# Altium PCB PCB1.PcbDoc
Units mil, origin at the board's own origin, x right, y up, seen from the top; angles counter-clockwise.
Board outline 2637.8 x 1850.39 mil, 2 copper layers (Top Layer, Bottom Layer); 76 components, 45 nets, 279 pads, 190 vias.
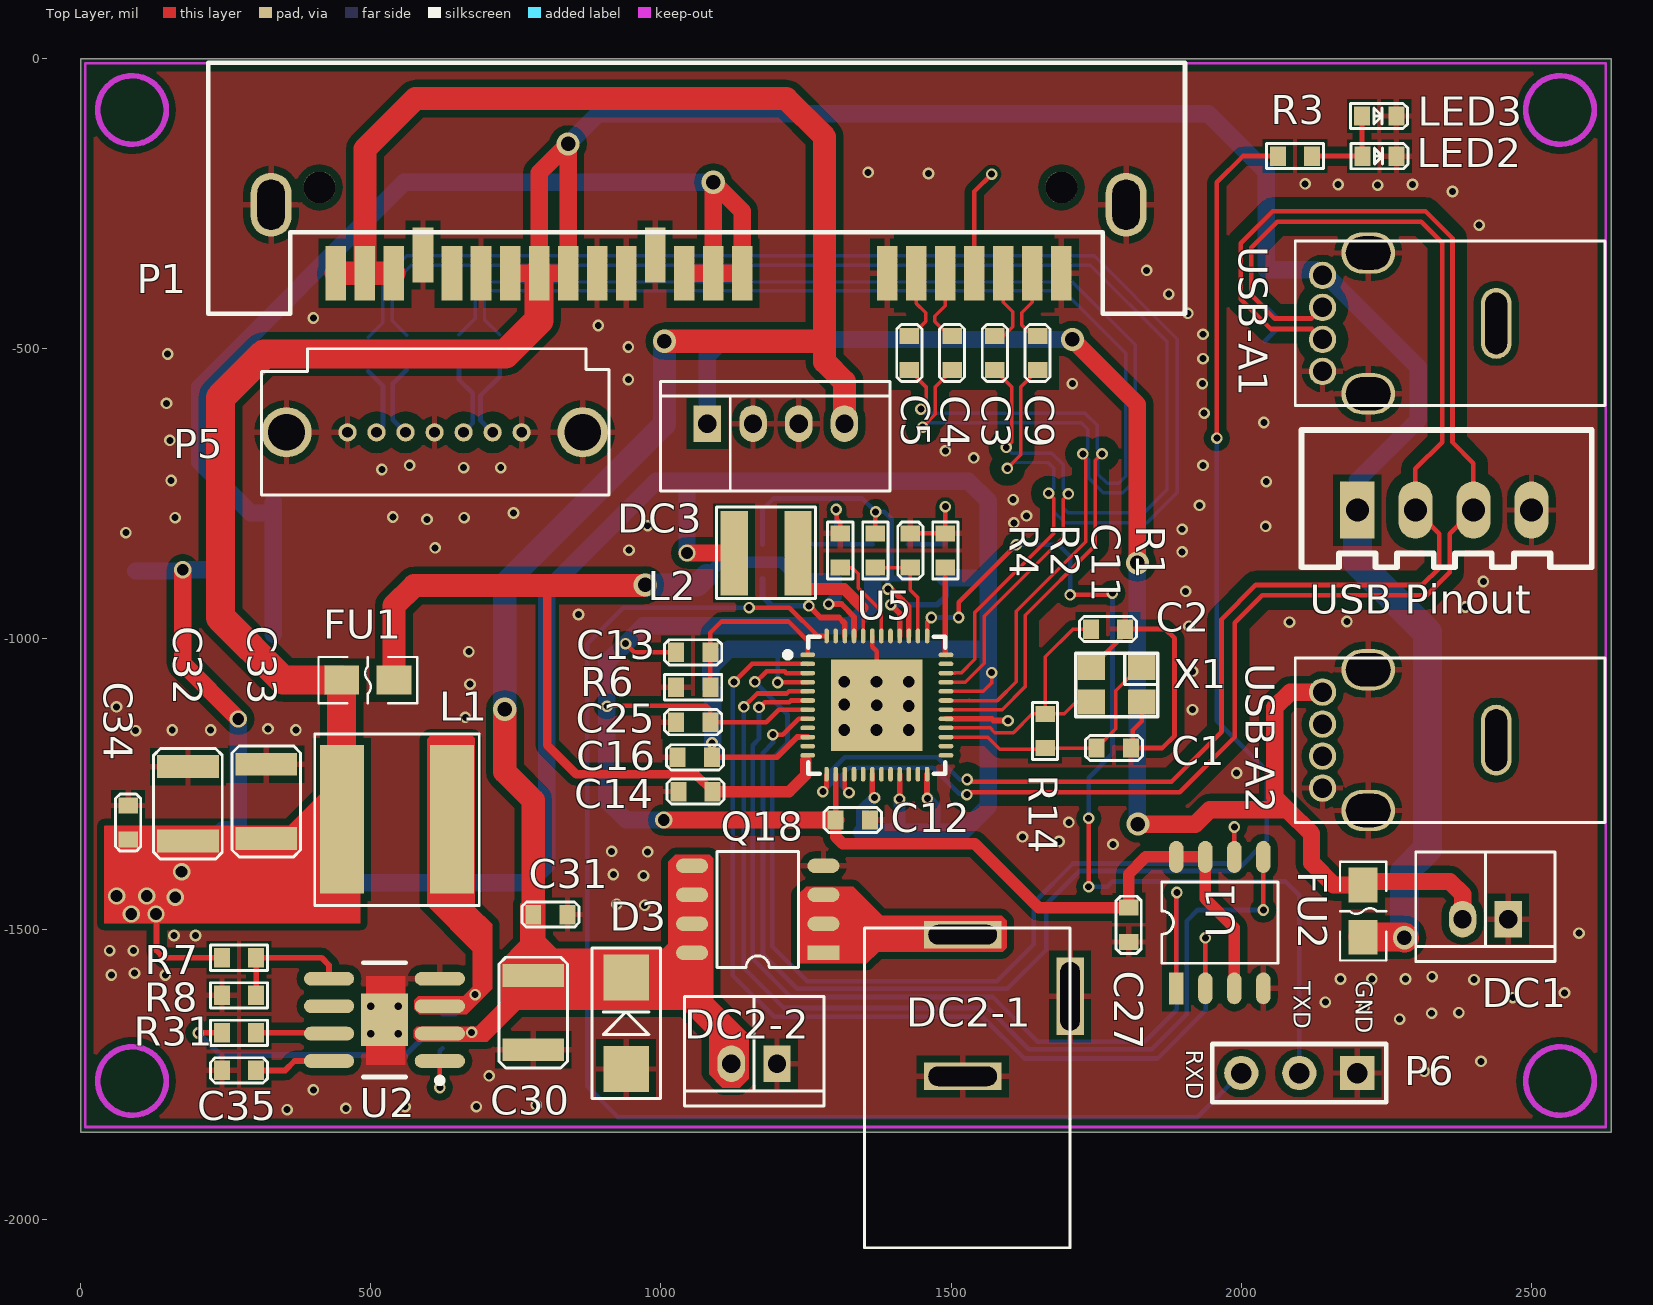
[diagram p0: Top Layer view]
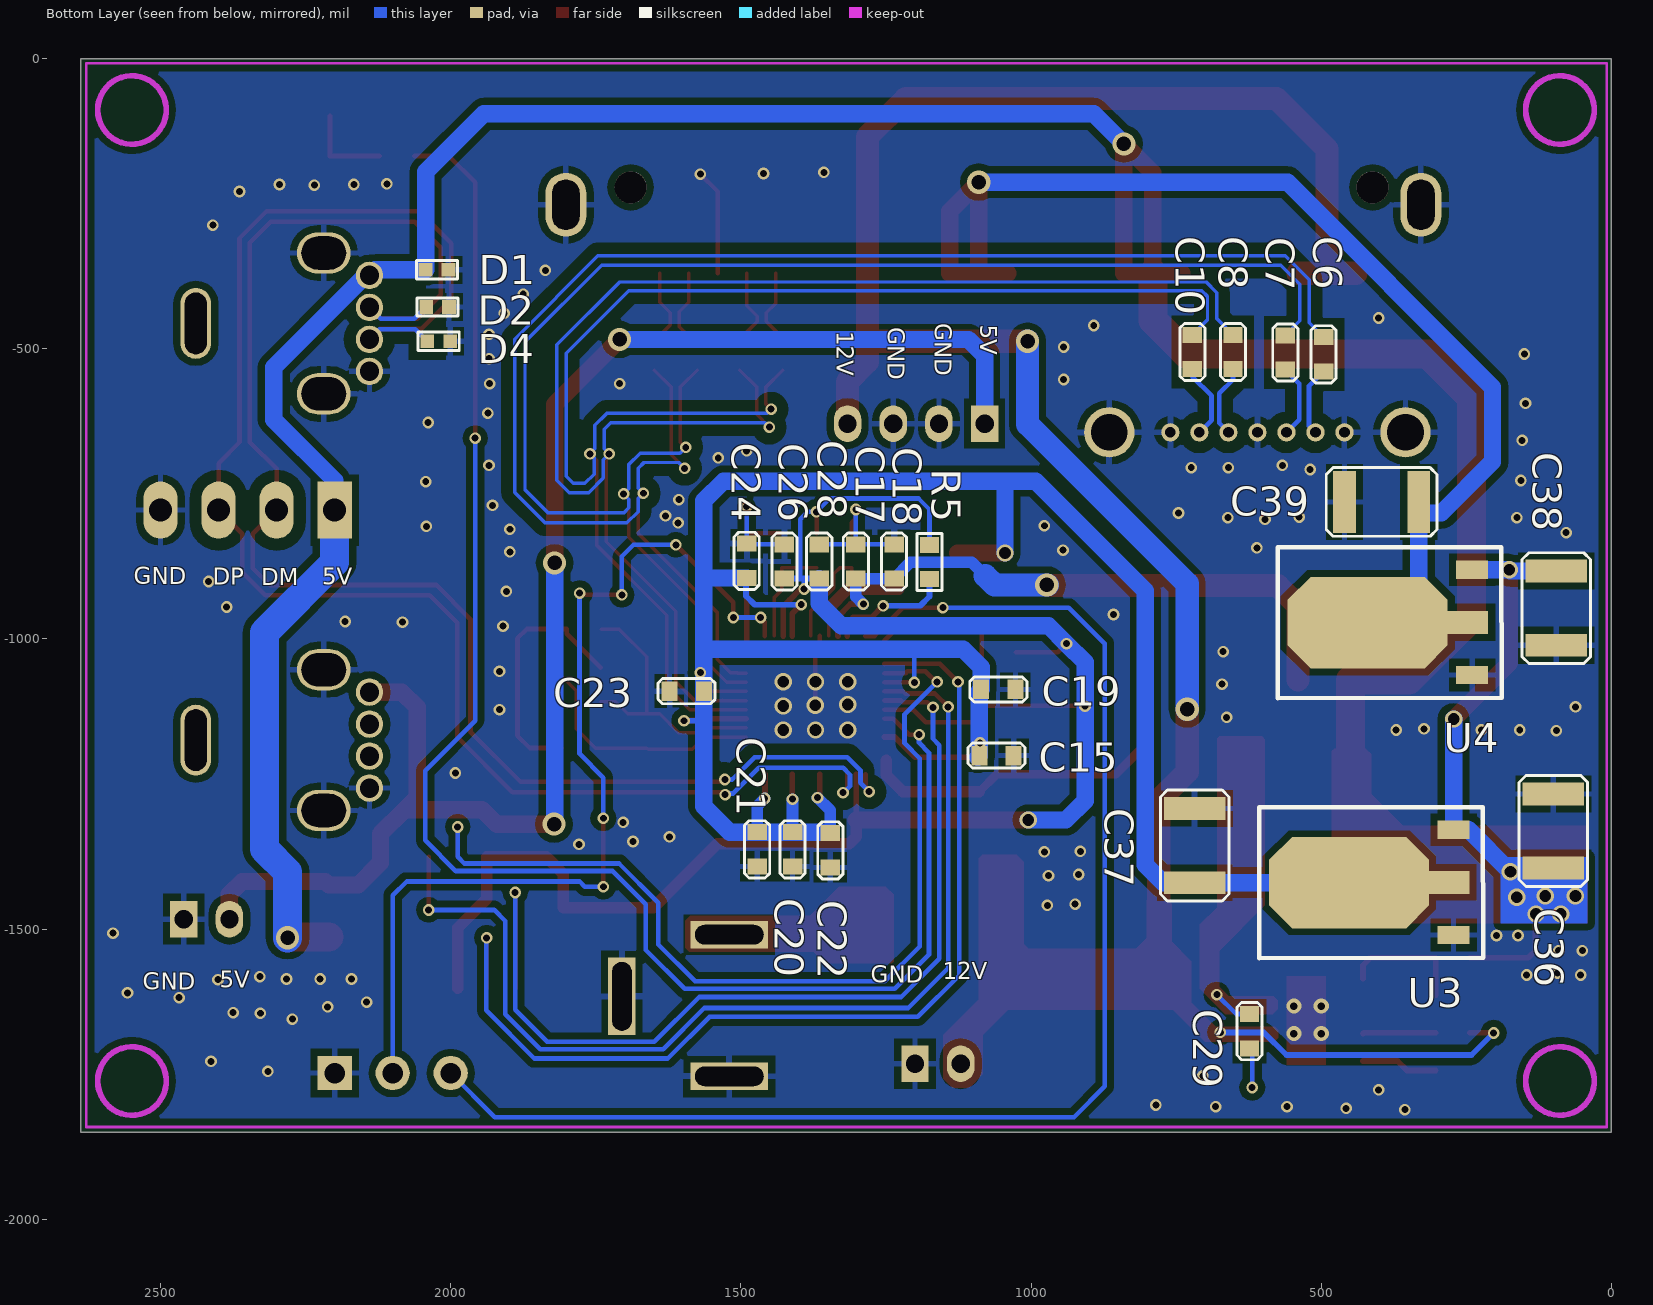
[diagram p1: Bottom Layer view, seen from below]

## Layer stack, top to bottom
Top Layer: signal copper 1.4
Dielectric: dielectric 12.6, FR-4, Dk 4.8
Bottom Layer: signal copper 1.4

## Board outline
0,-1850.39 2637.8,-1850.39 2637.8,0 0,0

## Design rules (kind name [scope] priority, off if disabled: settings)
Clearance hspeed [InNetClass('hspeed')] p1: gap=10
Clearance gnd [InPolygon] p2: gap=12
Clearance [All] p3: gap=5
DiffPairsRouting [All] p1: maxlimit=10 minlimit=10 mostfreqgap=10 maxuncoupledlength=500
MinimumSolderMaskSliver [All] p1: minsoldermaskwidth=1
PolygonConnect PolygonConnect_1 [IsVia] p1: connectstyle=Direct reliefconductorwidth=10 reliefentries=4 polygonreliefangle="90 Angle"
PolygonConnect [All] p2: connectstyle=Relief reliefconductorwidth=10 reliefentries=4 polygonreliefangle="90 Angle"
RoutingVias [All] p1: holewidth=28 width=50 viastyle="Through Hole" minholewidth=28 minwidth=50 maxholewidth=28 maxwidth=50
SilkToSilkClearance [All] p1: silktosilkclearance=1
SilkscreenOverComponentPads [All] p1: minsilkscreentomaskgap=1
SolderMaskExpansion [All] p1: expansion=4
Width [All] p1: maxlimit=300 minlimit=6 preferedwidth=10
24 further rules are at their usual default settings.

## Classes and differential pairs
component class CONNECTOR: C3 C4 C5 C6 C7 C8 C9 C10 D1 D2 D4 DC1 DC2-1 DC2-2 DC3 P1 P5 "USB Pinout" USB-A1 USB-A2
component class CPU: C1 C2 C11 C12 C13 C14 C15 C16 C17 C18 C19 C20 C21 C22 C23 C24 C25 C26 C27 C28 L2 LED2 LED3 P6 R1 R2 R3 R4 R5 R6 R14 U1 U5 X1
component class power: C29 C30 C31 C32 C33 C34 C35 C36 C37 C38 C39 D3 FU1 FU2 L1 Q18 R7 R8 R31 U2 U3 U4
net class hspeed: D_N D_P NetC3_2 NetC4_2 NetC5_2 NetC6_2 NetC7_2 NetC8_2 NetC9_2 NetC10_2 RX_N RX_P TX_N TX_P
differential pair RX: +RX_P -RX_N
differential pair TX: +TX_P -TX_N
differential pair D: +D_P -D_N

## Components (designator, comment, footprint, x,y, rotation, side; value= is the part's Value field where it differs from the comment)
C1 "20pF" 0603c 1810,-1188 r180 top
C2 "20pF" 0603C 1800,-983 r180 top
C3 "0.1uF/25V" 0603C 1575.33,-537 r90 top
C4 "0.1uF/25V" 0603C 1501.67,-537 r90 top
C5 "0.1uF/25V" 0603C 1428,-537 r90 top
C6 "0.1uF/25V" 0603C 496,-480 r270 bottom
C7 "0.1uF/25V" 0603C 562,-476.95 r270 bottom
C8 "0.1uF/25V" 0603C 652,-475.95 r270 bottom
C9 "0.1uF/25V" 0603C 1649,-537 r90 top
C10 "0.1uF/25V" 0603C 722,-475.95 r270 bottom
C11 "0.1uF/25V" 0603C 1429.67,-877 r90 top
C12 "0.1uF/25V" 0603C 1301,-1312 r0 top
C13 "1uF/25V" 0603C 1026,-1023 r0 top
C14 "0.1uF/25V" 0603C 1089,-1263 r180 top
C15 "10uF/25V" 0603C 1089,-1201 r180 bottom
C16 "0.1uF/25V" 0603C 1088,-1204 r180 top
C17 "10uF/25V" 0603C 1302,-896 r90 bottom
C18 "0.1uF/25V" 0603C 1236,-896 r90 bottom
C19 "0.1uF/25V" 0603C 1086,-1087 r180 bottom
C20 "0.1uF/25V" 0603C 1411,-1333 r270 bottom
C21 "0.1uF/25V" 0603C 1472,-1333 r270 bottom
C22 "0.1uF/25V" 0603C 1346,-1334.65 r270 bottom
C23 "0.1uF/25V" 0603C 1564,-1090 r0 bottom
C24 "0.1uF/25V" 0603C 1490,-895 r90 bottom
C25 "0.1uF/25V" 0603C 1085.06,-1143.5 r180 top
C26 "0.1uF/25V" 0603C 1425,-896 r90 bottom
C27 "0.1uF/25V" 0603C 1806,-1463 r270 top
C28 "0.1uF/25V" 0603C 1365,-896 r90 bottom
C29 "0.1uF/25V" 0603C 623.62,-1705.38 r90 bottom
C30 "100uF/25V" 1210C 780,-1580 r270 top
C31 "0.1uF/25V" 0603C 780,-1475 r0 top
C32 "100uF/25V" 1210C 185,-1348 r90 top
C33 "100uF/25V" 1210C 320,-1344 r90 top
C34 "0.1uF/25V" 0603C 82,-1346 r90 top
C35 "0.1uF/25V" 0603C 302.68,-1743.38 r180 top
C36 "22uF/25V" 1210C 100,-1395 r90 bottom
C37 "22uF/25V" 1210C 718,-1420 r90 bottom
C38 "22uF/25V" 1210C 95,-883 r270 bottom
C39 "22uF/25V" 1210C 332,-764 r0 bottom
D1 "PESD5V0S1UL" 0402R 2004,-364 r0 bottom
D2 "PESD5V0S1UL" 0402R 2003,-428 r0 bottom
D3 "SMAJ12CA" SMA 940,-1741 r90 top
D4 "PESD5V0S1UL" 0402R 2001,-487 r0 bottom
DC1 "DC1" 2X2MMZ 2460,-1483 r180 top
DC2-1 "DC2-1" DC005 1520,-2049 r90 top locked
DC2-2 "DC2-2" 2X2MMZ 1200,-1732 r180 top
DC3 "DC3" 2X4MMZ 1080,-629 r0 top
FU1 "1A/6V" F0805 450,-1071 r0 top
FU2 "3A/6V" F0805 2210,-1514 r90 top
L1 "XAL7030-103MEC" XAL7030 640,-1311 r180 top
L2 "NRS4012T4R7MDGJ" NRS4012T4R7MDGJ 1126,-852 r0 top
LED2 "" 0603LED 2208.55,-168.22 r0 top
LED3 "" 0603LED 2208,-99 r0 top
P1 "SATA7+15P" "SATA 7+15PML" 440,-370 r180 top locked
P5 "Header 9" "SATA 7P" 460,-644 r0 top
P6 "Header 3" HDR1X3 2200,-1748 r180 top
Q18 "DTM4435" SO-8 1280,-1541 r180 top
R1 "12K/1%" 0603R 1490,-877 r90 top
R2 "510K" 0603R 1369.33,-877 r90 top
R3 "330" 0603R 2063,-168 r0 top
R4 "100K" 0603R 1309,-877 r90 top
R5 "100K" 0603R 1175,-897 r90 bottom
R6 "4.7K" 0603R 1085.06,-1083.25 r180 top
R7 "44.2K/1%" 0603R 243.62,-1549.38 r0 top
R8 "10K/1%" 0603R 302.68,-1614.04 r180 top
R14 "1MR" 0603R 1662,-1129 r270 top
R31 "100k" 0603R 302.68,-1678.71 r180 top
U1 "MX25L1006E" SO-8 1888,-1602 r90 top
U2 "FR9888SPG" SOP120P600-8N 523.62,-1656.38 r180 top
U3 "LD1117-1.2" sot223 272,-1510 r90 bottom
U4 "LD1117-3.3" sot223 240,-1062 r90 bottom
U5 "JMS578" QFN400P600-8N 1372,-1114 r0 top locked
"USB Pinout" "USB Pinout" sip-4l 2200,-778 r0 top
USB-A1 "Header 6" USB-A-C 2140,-539 r90 top
USB-A2 "Header 6" USB-A-C 2140,-1257 r90 top
X1 "30MHz/20P" XTAL4TN_3225 1785,-1079 r180 top

## Footprints (in the part's own frame and the unit in brackets; to place one, negate y for a bottom-side part, rotate by r counter-clockwise, add the part's x,y. Pads: shape width x height; smd on the part's side, far side on the other; paste and mask are expansions set on the pad)
2X2MMZ [mm]
  rect 1.2x1.6 hole 0.8: 1(0,0)
  oval 1.2x1.6 hole 0.8: 2(2,0)
  silkscreen extent -2.05,-2.95 4.05,1.85
2X4MMZ [mm]
  rect 1.2x1.6 hole 0.8: 1(0,0)
  oval 1.2x1.6 hole 0.8: 2(2,0) 3(4,0) 4(6,0)
  silkscreen extent -2.05,-2.95 8,1.85
0402R [mm]
  rect 0.6x0.6 smd: 1(0,0) 2(1,0)
  silkscreen extent -0.4,-0.4 1.4,0.4
0603c [mm]
  rect 0.7x0.85 smd: 1(0,0) 2(1.5,0)
  silkscreen extent -0.5,-0.55 2,0.55
0603C [mm]
  rect 0.7x0.85 smd: 1(0,0) 2(1.5,0)
  silkscreen extent -0.5,-0.55 2,0.55
0603LED [mm]
  rect 0.7x0.85 smd: 1(0,0) 2(1.5,0)
  silkscreen extent -0.5,-0.55 2,0.55
0603R [mm]
  rect 0.7x0.85 smd: 1(0,0) 2(1.5,0)
  silkscreen extent -0.5,-0.55 2,0.55
1210C [mm]
  rect 1x2.7 smd: 1(0,0) 2(3.25,0)
  silkscreen extent -0.8,-1.5 4.05,1.5
DC005 [mm]
  rect 3.4x1.2 hole 0.85 slot 3 at 0 deg: 2(11,-4.7)
  rect 1.2x3.4 hole 0.85 slot 3 at 90 deg: 3(7.5,0) 4(13.7,0)
  silkscreen extent 0,-4.7 14,4.3
F0805 [mil]
  rect 60x50 smd: 1(0,0) 2(90,0)
  silkscreen extent -40,-40 130,40, body extent 4,-23 82,24, height 20
HDR1X3 [mm] "Connector; Header; 3 Position"
  rect 1.5x1.5 hole 0.9: 1(0,0)
  round 1.5 hole 0.9: 2(2.54,0) 3(5.08,0)
  silkscreen extent -1.27,-1.27 6.35,1.27
NRS4012T4R7MDGJ [mm]
  rect 1.2x3.7 smd: 1(0,0) 2(2.8,0)
  silkscreen extent -0.76,-1.98 3.56,2.02
QFN400P600-8N [mm]
  oval 0.65x0.2 smd: 1(-3.025,2.2) 2(-3.025,1.8) 3(-3.025,1.4) 4(-3.025,1) 5(-3.025,0.6) 6(-3.025,0.2) 7(-3.025,-0.2) 8(-3.025,-0.6) 9(-3.025,-1) 10(-3.025,-1.4) 11(-3.025,-1.8) 12(-3.025,-2.2) 25(3.025,-2.2) 26(3.025,-1.8) 27(3.025,-1.4) 28(3.025,-1) 29(3.025,-0.6) 30(3.025,-0.2) 31(3.025,0.2) 32(3.025,0.6) 33(3.025,1) 34(3.025,1.4) 35(3.025,1.8) 36(3.025,2.2)
  oval 0.2x0.65 smd: 13(-2.2,-3.025) 14(-1.8,-3.025) 15(-1.4,-3.025) 16(-1,-3.025) 17(-0.6,-3.025) 18(-0.2,-3.025) 19(0.2,-3.025) 20(0.6,-3.025) 21(1,-3.025) 22(1.4,-3.025) 23(1.8,-3.025) 24(2.2,-3.025) 37(2.2,3.025) 38(1.8,3.025) 39(1.4,3.025) 40(1,3.025) 41(0.6,3.025) 42(0.2,3.025) 43(-0.2,3.025) 44(-0.6,3.025) 45(-1,3.025) 46(-1.4,3.025) 47(-1.8,3.025) 48(-2.2,3.025)
  rect 0x0 smd: 49(-0.85,0) 50(-0.35,0) 51(0,0.85) 52(0,0.35) 53(0.85,0) 54(0.35,0) 55(0,-0.85) 56(0,-0.35)
  rect 4x4 smd: 49(0,0)
  silkscreen extent -4.02,-3 3,3
"SATA 7+15PML" [mm]
  rect 0.9x2.4 smd: 1(-31.75,0) 2(-30.48,0) 3(-29.21,0) 4(-27.94,0) 5(-26.67,0) 6(-25.4,0) 7(-24.13,0) 8(-17.78,0) 9(-16.51,0) 10(-15.24,0) 11(-13.97,-0.8) 12(-12.7,0) 13(-11.43,0) 14(-10.16,0) 15(-8.89,0) 16(-7.62,0) 17(-6.35,0) 18(-5.08,0) 19(-3.81,-0.8) 20(-2.54,0) 21(-1.27,0) 22(0,0)
  round 1.4 hole 1.4: 23(-31.75,-3.76) 24(0.72,-3.76)
  oval 1.8x2.8 hole 1.2 slot 2.2 at 90 deg: 25(-34.585,-3) 26(2.835,-3)
  silkscreen extent -37.16,-9.22 5.59,1.78
"SATA 7P" [mm]
  round 0.8 hole 0.47: 1(0,0) 2(1.27,0) 3(2.54,0) 4(3.81,0) 5(5.08,0) 6(6.35,0) 7(7.62,0)
  round 2.2 hole 1.6: 8(10.29,0) 9(-2.67,0)
  silkscreen extent -3.76,-2.74 11.44,3.66
sip-4l [mm]
  rect 1.5x2.5 hole 1: 1(0,0)
  oval 1.5x2.5 hole 1: 2(2.54,0) 3(5.08,0) 4(7.62,0)
  silkscreen extent -2.44,-2.5 10.26,3.5
SMA [mm]
  rect 2x2 smd: 1(0,0) 2(4,0)
  silkscreen extent -1.3,-1.5 5.3,1.5
SO-8 [mil]
  rect 55x25 smd: 1(0,0)
  oval 55x25 smd: 2(0,-50) 3(0,-100) 4(0,-150) 5(226.38,-150) 6(226.38,-100) 7(226.38,-50) 8(226.38,0)
  silkscreen extent 43,-175 183,25
SOP120P600-8N [mm]
  oval 2.2x0.6 smd: 1(-2.425,1.8) 2(-2.425,0.6) 3(-2.425,-0.6) 4(-2.425,-1.8) 5(2.425,-1.8) 6(2.425,-0.6) 7(2.425,0.6) 8(2.425,1.8)
  rect 2.05x2.3 smd: 9(0,0)
  silkscreen extent -2.55,-2.5 0.93,2.77
sot223 [mm]
  rect 0.8x1.4 smd: 1(0,0) 3(4.6,0)
  rect 1x1.854 smd: 2(2.3,0.227)
  oct 4x7 smd: 4(2.286,4.572)
  silkscreen extent -1.02,-1.3 5.59,8.51
USB-A-C [mm]
  round 1.2 hole 0.85: 1(4.2,0) 2(2.8,0) 3(1.4,0) 4(0,0)
  oval 1.8x2.35 hole 1.45 slot 1.95 at 90 deg: 5(-0.98,-2) 6(5.18,-2)
  oval 3.1x1.35 hole 0.95 slot 2.7 at 0 deg: 7(2.1,-7.6)
  silkscreen extent -1.5,-12.36 5.7,1.19
XAL7030 [mm]
  rect 1.92x6.5 smd: 1(0,0) 2(4.82,0)
  silkscreen extent -1.19,-3.74 6.01,3.76
XTAL4TN_3225 [mm]
  rect 1.2x1.1 smd: 1(-1.1,-0.75) 2(1.1,-0.75) 3(1.1,0.75) 4(-1.1,0.75)
  silkscreen extent -1.8,-1.38 1.79,1.4

## Part data
C1 C2: library part CAP, "Capacitor"
C3 C4 C5 C6 C7 C8 C9 C10 C11 C12 C13 C14 C15 C16 C17 C18 C19 C20 C21 C22 C23 C24 C25 C26 C27 C28 C29 C30 C31 C32 C33 C34 C35 C36 C37 C38 C39: library part 0.01UF, "CCX85-103"
D1 D2 D4: library part "D Zener", "Zener Diode"
D3: library part "DIODE S", "Schottky Diode"
DC1 DC2-2: library part "Header 2", "Header, 2-Pin"
DC2-1 DC3 "USB Pinout": library part "Header 4", "Header, 4-Pin"
FU1 FU2: library part FUSE2, "Fuse"
L1 L2: library part INDUCTOR
LED2 LED3: library part LED
P1: "Conn SATA PL 15Power/7Signal POS 1.27mm Solder RA Thru-Hole 22 Terminal 1 Port"
P5: "Header, 9-Pin"
P6: "Header, 3-Pin"
Q18: library part Si4004DY, "Si4004DY"
R1 R2 R4 R5 R6 R7 R8 R14 R31: library part Res3, "Resistor"
R3: library part R, "R"
U1: library part M25P40-VMN6
U4: library part LD1117-1.2
USB-A1 USB-A2: "Header, 6-Pin"
X1: library part CRYSTAL_2

## Via types
v1: diameter 20, hole 12, Top Layer to Bottom Layer, tented both sides, 158 vias
v2: diameter 30, hole 20, Top Layer to Bottom Layer, tented both sides, 19 vias
v3: diameter 40, hole 25, Top Layer to Bottom Layer, tented both sides, 9 vias
v4: diameter 25.98, hole 12.99, Top Layer to Bottom Layer, tented top, 4 vias

## Nets (pads, with @x,y where several pads share a name; then routed paths per layer and width w, separated by ;. In a path a pad name is that pad's centre, name@x,y a point inside that pad or via, vN(x,y) a via of type N, cw(c..) or ccw(c..) an arc to the next point about the centre after c; other vN are vias at no path point)
CS: U1.1 U5.6 | length 1710.8
  Top Layer w8: v1@1169.5,-1118.5 1179,-1109 1221,-1109 1223.87,-1106.13 U5.6 ; U1.1 v1@1888,-1438
  Bottom Layer w8: v1(1169,-1118) 1169,-1172 1158,-1183 1158,-1551 1224,-1617 1572,-1617 1649,-1694 1834,-1694 1889,-1639 v1(1889,-1437) v1@1885,-1433
D_N: "USB Pinout.2" D2.2 U5.13 USB-A1.2 | length 2718.5
  Top Layer w8: v1(1279,-1263) 1285.39,-1256.61 U5.13 ; v1(1527.73,-1242.27) 1531.73,-1246.27 1879.73,-1246.27 1966,-1160 1966,-966 2025,-907 2312,-907 2341,-878 2341,-819 2300,-778 2300,-707 2346,-661 2346,-317 2310,-281 2062,-281 2017,-326 2017,-407 2058,-448 2120.76,-448 USB-A1.2
  Bottom Layer w8: v1(1279,-1263) 1294,-1248 1294,-1226.54 1316.54,-1204 1476.46,-1204 1514.73,-1242.27 v1(1527.73,-1242.27) v1@1528,-1242 ; D2.2 2062.87,-448.5 2120.26,-448.5 USB-A1.2
D_P: "USB Pinout.3" D4.2 U5.15 USB-A1.3 | length 2862.8
  Top Layer w8: U5.15 1316.88,-1257.88 v1(1324,-1265) ; v1(1527,-1268.27) 1531,-1264.27 1893.73,-1264.27 1989,-1169 1989,-972 2036,-925 2319.46,-925 2359,-885.46 2359,-819 2400,-778 ; USB-A1.3 2122.12,-466 2050.54,-466 1999,-414.46 1999,-318.54 2054.54,-263 2317.46,-263 2364,-309.54 2364,-661 2400,-697 2400,-778 ; 2400,-727 2400,-778
  Bottom Layer w8: v1(1324,-1265) 1323,-1265 1312,-1254 1312,-1234 1324,-1222 1469,-1222 1513.27,-1266.27 v1@1527,-1266.27 ; D4.2 2060.87,-466.5 2122.62,-466.5 USB-A1.3
GND: "USB Pinout.4" C1.1 C2.1 C11.2 C12.2 C14.2 C15.2 C16.2 C17.2 C18.2 C19.2 C20.2 C21.2 C22.2 C23.2 C24.2 C25.2 C26.2 C27.2 C28.2 C30.2 C31.2 C32.2 C33.2 C34.2 C35.2 C36.2 C37.2 C38.2 C39.2 D1.1 D2.1 D3.1 D4.1 DC1.1 DC2-1.2 DC2-1.3 DC2-2.1 DC3.2 DC3.3 LED2.2 LED3.2 P1.1 P1.4 P1.7 P1.11 P1.12 P1.13 P1.17 P1.19 P1.25 P1.26 P5.1 P5.4 P5.7 P5.8 P5.9 P6.1 Q18.4 R1.2 R4.2 R6.2 R8.2 U1.4 U2.4 U2.9 U3.1 U4.1 U5.43 U5.49 USB-A1.4 USB-A1.5 USB-A1.6 USB-A2.4 USB-A2.5 USB-A2.6 X1.2 X1.4 | length 1295.2
  Top Layer w8: v1(1302,-777) 1303,-778 1303,-794 1309,-800 R4.2 ; U5.43 1364.13,-1013.13 1372,-1021 v2(1372,-1114) ; C11.2 R1.2 v1(1490,-772) ; P1.4 1540,-229 v1(1570,-199) ; X1.2 1800,-991.17 C2.1 1869,-983 1885,-999 1885,-1167 1864,-1188 C1.1 1813,-1185 1813,-1157 1828.31,-1141.69 X1.4
  Bottom Layer w8: C18.2 C17.2 ; v1(1302,-777) C17.2 ; C28.2 C17.2 ; C26.2 1489,-836.94 C24.2 v1(1490,-772)
  other v1: 356,-1811 457,-1809 559,-1806 682,-1806 785,-1803 401,-1777 704,-1753 2315,-1745 2413,-1728 2273,-1655 2328,-1645 2375,-1644 2212,-1634 2145,-1626 2468,-1618 2557,-1610 2401,-1587 2171,-1586 2225,-1586 2283,-1586 2329,-1582 53,-1579 146,-1579 93,-1576 50,-1537 91,-1537 161,-1511 198,-1511 2582,-1507 972,-1459 924,-1457 970,-1408 918,-1406 977,-1367 915,-1366 1779,-1354 1686,-1349 1623,-1341 1703,-1316 1992,-1231 95,-1158 158,-1157 224,-1157 371,-1157 323,-1155 663,-1135 1916,-1122 62,-1117 671,-1078 1916,-1056 669,-1022 1910,-978 2083,-971 2182,-970 858,-958 2386,-945 1904,-918 2417,-901 1898,-850 945,-847 611,-843 78,-817 1898,-811 2042,-806 977,-805 1608,-800 597,-794 163,-791 661,-791 538,-790 1630,-788 746,-783 1928,-770 1607,-760 2043,-729 156,-727 519,-708 660,-705 724,-705 567,-701 1934,-701 1539,-688 1490,-676 154,-658 2039,-627 1936,-611 148,-594 1709,-560 1933,-560 944,-553 1934,-517 150,-509 944,-497 1934,-475 892,-460 401,-447 1908,-439 1875,-406 1837,-365 2410,-287 2364,-229 2235,-218 2167,-217 2295,-217 2110,-216 1461,-198 1357,-196
  other v2: 1316,-1157 1371.5,-1157 1427,-1157 1427,-1115.5 1316,-1113 1316,-1074 1371.5,-1074 1427,-1074
  other v4: 500,-1680 547.24,-1680 500,-1632.76 547.24,-1632.76
GPIO4: R3.1 U5.8 | length 2799.5
  Top Layer w8: v1(1193,-1165) 1210,-1165 1237.38,-1137.62 U5.8 ; v1(1958,-654) 1958,-213 2003,-168 R3.1
  Bottom Layer w8: v1@1196,-1168 v1(1193,-1165) 1193,-1179 1176,-1196 1176,-1544 1235,-1603 1597,-1603 1664,-1536 1664,-1457 1721,-1400 1991,-1400 2044,-1347 2044,-1227 1958,-1141 v1(1958,-654)
GPIO5: U5.9
MISO: U1.2 U5.2 | length 1767.7
  Top Layer w8: v1(1126,-1074) 1157,-1043 1252.77,-1043 U5.2 ; U1.2 v1(1938,-1515)
  Bottom Layer w8: v1(1126,-1074) 1124,-1076 1124,-1580 1195,-1651 1554,-1651 1626,-1723 1856,-1723 1939,-1640 1939,-1516 v1(1938,-1515)
MOSI: U1.5 U5.5 | length 1809
  Top Layer w8: v1(1143,-1117) 1166,-1094 1217,-1094 1220.62,-1090.38 U5.5 ; v1(2038,-1467) U1.5
  Bottom Layer w8: v1(1143,-1117) 1143,-1567 1212,-1636 1563,-1636 1634,-1707 1846,-1707 1906,-1647 1906,-1486 1925,-1467 v1(2038,-1467)
NetC1_2: C1.2 R14.2 U5.27 X1.1 | length 443
  Top Layer w6: U5.27 1563.12,-1169.12 1584,-1190 1660.06,-1190 R14.2 1750.89,-1188.06 C1.2 ; C1.2@1750.69,-1187.75 C1.2 ; X1.1 1823.7,-1049.47 1784,-1089.17 1784,-1154.94 C1.2
NetC2_2: C2.2 R14.1 U5.28 X1.3 | length 472.7
  Top Layer w6: U5.28 1567.37,-1153.37 1575.5,-1161.5 1607.5,-1161.5 1640,-1129 1659,-1129 R14.1 ; C2.2 1710,-983 1662,-1031 R14.1 ; X1.3 1715.47,-1108.53 1695,-1129 R14.1
NetC3_2: C3.2 P1.3 | length 135.9
  Top Layer w6: C3.2 1590.06,-477.94 1606,-462 1606,-436 1590,-420 P1.3
NetC4_2: C4.2 P1.5 | length 130.5
  Top Layer w6: P1.5 1490,-426 1472,-444 1472,-453 1496.94,-477.94 C4.2
NetC5_2: C5.2 P1.6 | length 128
  Top Layer w6: C5.2 1431.06,-477.94 1456,-453 1456,-438 1440,-422 P1.6
NetC6_2: C6.2 P5.2 | length 119.9
  Bottom Layer w8: C6.2 521,-564.06 521,-633 P5.2
NetC7_2: C7.2 P5.3 | length 127.1
  Bottom Layer w8: P5.3 538,-622 538,-560 C7.2
NetC8_2: C8.2 P5.5 | length 125.6
  Bottom Layer w8: C8.2 652,-553 676,-577 676,-628 P5.5
NetC9_2: C9.2 P1.2 | length 131.3
  Top Layer w6: P1.2 1640,-420 1622,-438 1622,-459 1640.94,-477.94 C9.2
NetC10_2: C10.2 P5.6 | length 131.4
  Bottom Layer w8: P5.6 689,-623 689,-581 722,-548 C10.2
NetC11_1: C11.1 R2.1 U5.38 | length 193.6
  Top Layer w6: R2.1 C11.1 1429.67,-915.67 1442.87,-928.87 1442.87,-967 ; U5.38 1442.87,-967 ; 1442.87,-976.91 1442.87,-967
NetC13_2: C13.2 R6.1 U5.1 | length 308.1
  Top Layer w8: R6.1 C13.2 1085.06,-988.94 1104,-970 1220,-970 1252.91,-1002.91 U5.1
NetC29_1: C29.1 U2.1 | length 115.1
  Top Layer w8: v1(619.09,-1772.91) U2.1
  Bottom Layer w8: v1(619.09,-1772.91) 619.09,-1709.91 C29.1
NetC29_2: C29.2 L1.1 U2.3 | length 70.2
  Bottom Layer w8: C29.2 646.68,-1646.32 v1(680,-1613)
NetC35_1: C35.1 U2.8 | length 132.2
  Top Layer w10: C35.1 352.62,-1743.38 368.76,-1727.24 U2.8
NetL2_2: L2.2 U5.44 | length 193.2
  Top Layer w6: 1348,-946 1348.38,-946.38 1348.38,-966 ; U5.44 1348.38,-966 ; 1348.38,-976.91 1348.38,-966
  Top Layer w20: L2.2@1228,-914 1316,-914 1348,-946
NetLED2_1: LED2.1 LED3.1 R3.2 | length 155.7
  Top Layer w8: R3.2 LED2.1@2208.33,-168 ; LED3.1 2208,-167.67 LED2.1@2208.33,-168 ; LED2.1 LED2.1@2208.33,-168
NetR1_1: R1.1 U5.36 | length 132.8
  Top Layer w10: 1490,-895 1490,-1026.29 U5.36
NetR4_1: R4.1 U5.42 | length 163.5
  Top Layer w6: R4.1@1309,-881.46 R4.1 1329,-877 1339.77,-887.77 1339.77,-912.23 1380,-952.46 1380,-976.78 1379.87,-976.91 U5.42
NetR5_1: R5.1 U5.46 | length 212.9
  Top Layer w10: v1(1255,-943) 1275,-963 1307,-963 1316.88,-972.88 U5.46
  Bottom Layer w10: R5.1 1175,-927 1191,-943 v1(1255,-943)
NetR7_2: R7.2 R8.1 U2.5 | length 218.8
  Top Layer w10: R8.1 R7.2 415.38,-1549.38 428.15,-1562.15 U2.5
NetR31_1: R31.1 U2.7 | length 126
  Top Layer w10: R31.1 426.86,-1678.71 U2.7
RX_N: C4.1 C8.1 U5.31 | length 2693.9
  Top Layer w6: v1(1451,-635) 1472.83,-613.17 1472.83,-565.83 C4.1 ; U5.31 1530.87,-1106.13 ; 1531,-1106 1530.87,-1106.13 ; v1(1727,-681) 1732,-686 1732,-832.37 1612,-952.37 1612,-1074 1579.87,-1106.13 1530.87,-1106.13
  Bottom Layer w6: C8.1 680,-447.95 680,-403.37 698.37,-385 1709,-385 1817,-493 1817,-726.63 1795.63,-748 1762.37,-748 1737,-722.63 1737,-691 v1(1727,-681) 1735.5,-672.5 1735.5,-638.5 1724.5,-627.5 1458.5,-627.5 v1(1451,-635) v1@1447.25,-631.25
RX_P: C5.1 C10.1 U5.30 | length 2599.5
  Top Layer w6: C5.1 1456.83,-565.83 1456.83,-595.17 v1(1448,-604) ; U5.30 1588.13,-1121.87 1628,-1082 1628,-959 1748,-839 1748,-693 v1(1760,-681)
  Bottom Layer w6: C10.1 696,-449.95 696,-410 706,-400 1693,-400 1801,-508 1801,-720 1789,-732 1769,-732 1753,-716 1753,-688 v1(1760,-681) 1751.5,-672.5 1751.5,-631.87 1731.13,-611.5 1455.5,-611.5 v1(1448,-604)
RXD: P6.3 U5.48 | length 2403.8
  Top Layer w8: v1@1152,-948 v1(1152,-946) 1221,-946 1269.91,-994.91 U5.48
  Bottom Layer w8: v1(1152,-946) 935,-946 873,-1008 873,-1771 926,-1824 1924,-1824 P6.3
SCK: U1.6 U5.3 | length 1645.4
  Top Layer w8: v1@1162,-1076 1182,-1056 1213,-1056 1215.88,-1058.88 U5.3 ; U1.6 v1(1988,-1324)
  Bottom Layer w8: v1(1162,-1074) 1218,-1130 1218,-1180 1192,-1206 1192,-1530 1252,-1590 1579,-1590 1642.5,-1526.5 1642.5,-1454.5 1710,-1387 1976.62,-1387 1988,-1375.62 v1(1988,-1324)
TX_N: C3.1 C7.1 U5.33 | length 2728.3
  Top Layer w6: U5.33 1524.37,-1074.63 1557,-1042 1557,-961 1693,-825 1693,-759 v1(1702,-750) ; C3.1 1604.17,-565.83 1604.17,-661 v1@1595.17,-670
  Bottom Layer w6: C7.1 537,-451.95 537,-389 570,-356 1740,-356 1872,-488 1872,-743 1832,-783 1702,-783 1693,-774 1693,-759 v1(1702,-750) 1693,-741 1693,-699.37 1673.63,-680 1605,-680 v1(1595,-670)
TX_P: C6.1 C9.1 U5.34 | length 2828.4
  Top Layer w6: U5.34 1506,-1058.88 ; 1506,-1058.63 1517.37,-1058.63 1541,-1035 1541,-954.37 1677,-818.37 1677,-758 v1(1668,-749) ; v1(1597,-706) 1620.17,-682.83 1620.17,-565.83 C9.1
  Bottom Layer w6: C6.1 521,-455 521,-381 562,-340 1746.63,-340 1890,-483.37 1890,-747.63 1837.63,-800 1696.37,-800 1677,-780.63 1677,-758 v1(1668,-749) 1677,-740 1677,-706 1667,-696 1607,-696 v1(1597,-706)
TXD: P6.2 U5.37 | length 1695.2
  Top Layer w8: U5.37 1458.61,-970.39 v1(1466,-963) ; v1(1513,-963) 1513,-937 v1(1612,-838) ; v1(1705,-924) 1775,-924 v1(1778,-921) ; v1(1737,-1427) v1(1737,-1309)
  Bottom Layer w8: v1(1466,-963) v1(1513,-963) ; v1(1612,-838) 1685,-838 1705,-858 v1(1705,-924) ; v1(1737,-1427) 1769,-1427 1778,-1418 2076,-1418 2100,-1442 P6.2 ; v1(1737,-1309) 1737,-1239 1778,-1198 v1(1778,-921)
VBUS: C14.1 C17.1 C18.1 FU1.2 U5.12 U5.45 | length 1853.8
  Top Layer w10: v1(1289,-940) 1311,-940 1332.63,-961.63 U5.45
  Top Layer w15: 804,-917 804,-1183 854,-1233 1009.76,-1233 ; 1009.99,-1233.23 1059.23,-1233.23 C14.1
  Top Layer w20: C14.1 1221,-1263 1249.49,-1234.51 1249.49,-1209
  Top Layer w40: FU1.2 540,-943 575,-908 971,-908 v3@972,-907
  Bottom Layer w10: C17.1@1299,-899 C17.1
  Bottom Layer w20: 1079,-891 1102,-868 1208,-868 C18.1 C17.1 1302,-927 v1(1289,-940)
  Bottom Layer w40: v3@972,-907 1063,-907 1079,-891
  other v3: 973,-907
VCC: C30.1 C31.1 D3.2 DC2-2.2 DC3.4 P1.20 P1.21 P1.22 Q18.5 Q18.6 Q18.7 Q18.8 R31.2 U2.2 | length 3609.4
  Top Layer w10: v1(203,-1679) 203.29,-1678.71 R31.2
  Top Layer w40: P1.22 P1.21 ; P1.20 P1.21 ; v3(731,-1121) 731,-1229 780,-1278 C31.1 ; v3(1006,-487) 1272,-487 ; DC3.4 1316.22,-557 1282,-522.78 1282,-135 1216,-69 577,-69 490,-156 P1.21
  Bottom Layer w10: v1(203,-1679) 241,-1717 560,-1717 599,-1678 v1(674,-1678)
  Bottom Layer w40: v3(731,-1121) 731,-905 1006,-630 v3(1006,-487)
VCC_1.2V: C15.1 C16.1 C19.1 C20.1 C21.1 C22.1 C23.1 C24.1 C37.1 L2.1 U3.2 U3.4 U5.4 U5.10 U5.18 U5.21 U5.24 U5.29 U5.32 U5.40 | length 4439
  Top Layer w6: U5.32 1555.62,-1090.38 1570,-1076 v1(1570,-1058)
  Top Layer w8: v1@1201.37,-1074.63 U5.4
  Top Layer w10: v1(1088,-1179) C16.1 1140,-1204 ; 1132,-1204 1140,-1204 ; U5.10 1234.88,-1169.12 1200,-1204 1140,-1204 ; v1@1364.13,-1269.13 U5.18 ; v1(1396,-941) 1411.37,-956.37 U5.40 ; v1@1411.37,-1273.37 U5.21 ; v1@1458.61,-1272.39 U5.24 ; U5.29 1570,-1137.62 ; 1572.75,-1140.37 v1@1597.37,-1140.37
  Top Layer w30: v2(1045,-852) L2.1
  Bottom Layer w8: 1200,-1018 1201,-1019 v1(1201,-1075)
  Bottom Layer w10: v1(1396,-941) 1476,-941 1491,-926 1491,-896 C24.1 ; 1565,-1141 v1(1598,-1141)
  Bottom Layer w20: C22.1 1346,-1333 1346,-1295.37 v1(1368,-1273.37) ; C20.1 v1(1411,-1276) ; v1(1459,-1275) 1472,-1288 C21.1
  Bottom Layer w30: U3.4 C37.1 772,-1420 803,-1389 803,-917 992,-728 1530,-728 1564,-762 1564,-918 1564,-1020 ; v2(1045,-852) 1045,-729 ; C15.1@1092,-1204 C15.1 1089,-1090 C19.1 1086,-1049 1117,-1018 1200,-1018 1562,-1018 1564,-1020 ; C22.1@1346,-1333 C20.1 C21.1 1519,-1333 1564,-1288 C23.1 1564,-1020 ; C24.1 1564,-895
VCC_3.3V: C39.1 P1.8 P1.9 P1.10 U4.2 U4.4 | length 2003.4
  Top Layer w30: P1.10 P1.9 ; P1.9 P1.8 1140,-263 v3(1090,-213) P1.9
  Bottom Layer w30: U4.4@332,-992 C39.1@332,-783 ; C39.1 C39.1@332,-783 ; v3@1084,-213 1067,-213 ; v3(1090,-213) 1067,-213 ; C39.1@332,-783 293,-783 205,-695 205,-566 558,-213 1067,-213
VCC_5V: "USB Pinout.1" C32.1 C33.1 C34.1 C36.1 C38.1 D1.2 FU1.1 FU2.1 L1.2 P1.14 P1.15 P1.16 R7.1 U3.3 U4.3 USB-A1.1 | length 6000.1
  Top Layer w10: v2@131,-1474 131,-1537 143.38,-1549.38 R7.1
  Top Layer w30: v2(176.1,-880.9) 176.1,-1042.1 v2(272,-1138) ; P1.16 P1.15 ; v3@840,-146 v3(840,-147) ; v3@841,-146 v3(840,-147) ; P1.15 P1.14 v3(840,-147) ; P1.15 790,-197 v3(840,-147)
  Top Layer w50: L1.2 450,-1310.76 FU1.1 349,-1071 241,-963 241,-584 316,-509 732,-509 790,-451 P1.15 ; FU2.1 2280,-1514 v3(2281,-1515)
  Bottom Layer w30: C38.1 174,-883 v2(176.1,-880.9) U4.3 ; v2(174,-1401) 246.1,-1328.9 U3.3 v2(272,-1138) ; v3(840,-147) 892,-95 1943,-95 2043.37,-195.37 D1.2 2130.35,-364 USB-A1.1 2146.57,-373.65 2305,-532.07 2305,-622 2200,-727 2200,-778
  Bottom Layer w50: 2200,-778 2200,-868 2321,-989 2321,-1362 2281,-1402 v3(2281,-1515)
  other v2: 87,-1474 130,-1474 163,-1445 62,-1443 114,-1443
VCC_IN: DC2-1.4 Q18.1 Q18.2 Q18.3
VCCO: C12.1 C13.1 C25.1 C26.1 C27.1 C28.1 R2.2 R5.2 U1.3 U1.7 U1.8 U5.7 U5.14 U5.39 | length 3413.5
  Top Layer w8: v1@907,-1115 1078,-1115 1085.06,-1122.06 C25.1 1181.37,-1143.5 1202.87,-1122 1252.78,-1122 U5.7 ; v1(939,-1008) 954,-1023 C13.1 ; R2.2 1369.33,-781.67 v1(1370,-781)
  Top Layer w10: C12.1 1301.13,-1311.87 U5.14 ; v1(1391,-914) 1397.28,-914 1416,-932.72 ; 1416,-933 1427.12,-944.12 U5.39
  Top Layer w20: C12.1 1301,-1341 1313,-1353 1541,-1353 1651,-1463 C27.1 1806,-1405 1835.38,-1375.62 U1.8 U1.7 1938,-1448 1988,-1498 U1.3
  Top Layer w30: v2(1005,-1312) C12.1
  Bottom Layer w8: R5.2 1175,-777 1194,-758 1347,-758 v1(1370,-781) 1385,-781 1398,-794 1398,-892 1394,-896 1391,-899
  Bottom Layer w10: C28.1@1374,-905 C28.1 1394,-896 C26.1 ; v1(1391,-914) 1391,-899
  Bottom Layer w30: v2(1005,-1312) 940,-1312 907,-1279 v1(907,-1116) 907,-1040 v1(939,-1008) 970,-977 1327,-977 1365,-939 C28.1
VOUT_5V: DC1.2 DC3.1 FU2.2 USB-A2.1 | length 2622.8
  Top Layer w30: v3(1709,-484) 1821,-596 v3(1821,-869) ; v3(1822,-1319) 1921,-1319 1946,-1294 2079,-1294 ; USB-A2.1 2084.35,-1091.65 2058,-1118 2058,-1273 2079,-1294 ; DC1.2 2381.26,-1440.26 2359,-1418 2216,-1418 FU2.2 2209,-1424 2159,-1424 2121.04,-1386.04 2121.04,-1336.04 2079,-1294
  Bottom Layer w30: DC3.1 1080,-512 1108,-484 v3(1709,-484) ; v3@1821,-1318 v3(1821,-869)
pads on no net: P1.18 P1.23 P1.24 U2.6 U5.11 U5.16 U5.17 U5.19 U5.20 U5.22 U5.23 U5.25 U5.26 U5.35 U5.41 U5.47 U5.50 U5.51 U5.52 U5.53 U5.54 U5.55 U5.56 USB-A1.7 USB-A2.2 USB-A2.3 USB-A2.7

## Polygon pours and split planes (outlines as drawn)
GND on Top Layer "Top Layer-No Net" (solid, remove dead copper, pour order 1000): -171.95,126.5 2765.05,126.5 2820.05,181.5 2781.05,142.5 2781.05,-1817.5 2781.05,-1855.5 2743.05,-1893.5 -122.95,-1893.5 -122.95,-1653.5 -160.95,-1615.5 -54.95,-1509.5 -54.95,126.5
GND on Bottom Layer "Top Layer-No Net" (solid, remove dead copper, pour order 1001): -254,155 -210,111 2975,111 2975,-1835 2892,-1918 2746,-2064 1994,-2064 -185,-2064 -473,-1776 -112,-1415 -112,121

## Keep-outs
Keep-Out Layer:
  circle w10: c88.58,-88.58 r59.06
  circle w10: c88.58,-1761.81 r59.06
  circle w10: c2549.21,-88.58 r59.06
  circle w10: c2549.21,-1761.81 r59.06
  lines w5: 8,-1841 2628,-1841 2628,-8 8,-8 8,-1841

## Other copper
Top Layer:
  rectangle net GND: 492,-1734.33 560,-1581
  region net VCC_IN: 1250,-1427 1331,-1427 1381,-1477 1587,-1477 1596,-1486 1596,-1532 1589,-1539 1375,-1539 1355,-1559 1239.81,-1559 1236.81,-1556 1236.81,-1440.19
  region net VCC: 579,-1668 682,-1668 724,-1626 724,-1555 758,-1521 758,-1456 767,-1447 798,-1447 801,-1450 801,-1515 820,-1534 1004,-1534 1013,-1525 1013,-1384 1025,-1372 1084,-1372 1090,-1378 1090,-1621 1151,-1682 1151,-1758 1136,-1773 1106,-1773 1083,-1750 1083,-1683 1039,-1639 756,-1639 701,-1694 581,-1694 574,-1687 574,-1673
  region net NetC29_2: 584,-1647 665,-1647 709,-1603 709,-1492 679,-1462 679,-1171 676,-1168 602,-1168 597,-1173 597,-1459 676,-1538 676,-1599 659,-1616 582,-1616 575,-1623 575,-1638
  region net VCC_5V: 41.94,-1322 359,-1322 414,-1267 414,-1198 423,-1189 478,-1189 482,-1193 482,-1490 40.94,-1490 40.94,-1323
Bottom Layer:
  rectangle net VCC_5V: 40.94,-1490 190.94,-1376

## Silkscreen, mask and mechanical layers (free items; w line width, h text height)
Top Overlay:
  text "GND" at 2187,-1589 h50 r270
  text "TXD" at 2080,-1590 h50 r270
  text "RXD" at 1894.53,-1707.54 h50 r270
Bottom Overlay:
  text "GND" at 1176,-456 h50 r90
  text "5V" at 1097.68,-459.05 h50 r90
  text "GND" at 1257,-463 h50 r90
  text "12V" at 1345,-470 h50 r90
  text "GND" at 2546,-916 h50
  text "5V" at 2221,-917 h50
  text "DP" at 2410,-917 h50
  text "DM" at 2326.39,-918.06 h50
  text "12V" at 1152,-1597 h50
  text "GND" at 1276,-1603 h50
  text "5V" at 2398,-1611 h50
  text "GND" at 2531,-1615 h50
Mechanical 1:
  circle w10: c88.58,-88.58 r59.06
  circle w10: c88.58,-1761.81 r59.06
  circle w10: c2549.21,-88.58 r59.06
  circle w10: c2549.21,-1761.81 r59.06
  lines w5: 0,-1850.39 0,0 2637.8,0 2637.8,-1850.39 0,-1850.39